# Altium PCB Left Board.PcbDoc
Units mm, origin at the board's own origin, x right, y up, seen from the top; angles counter-clockwise.
Board outline 164.27 x 111 mm, 2 copper layers (Top Layer, Bottom Layer); 22 components, 29 nets, 130 pads, 66 vias.
Unrouted connection lines stored in the file: 1.
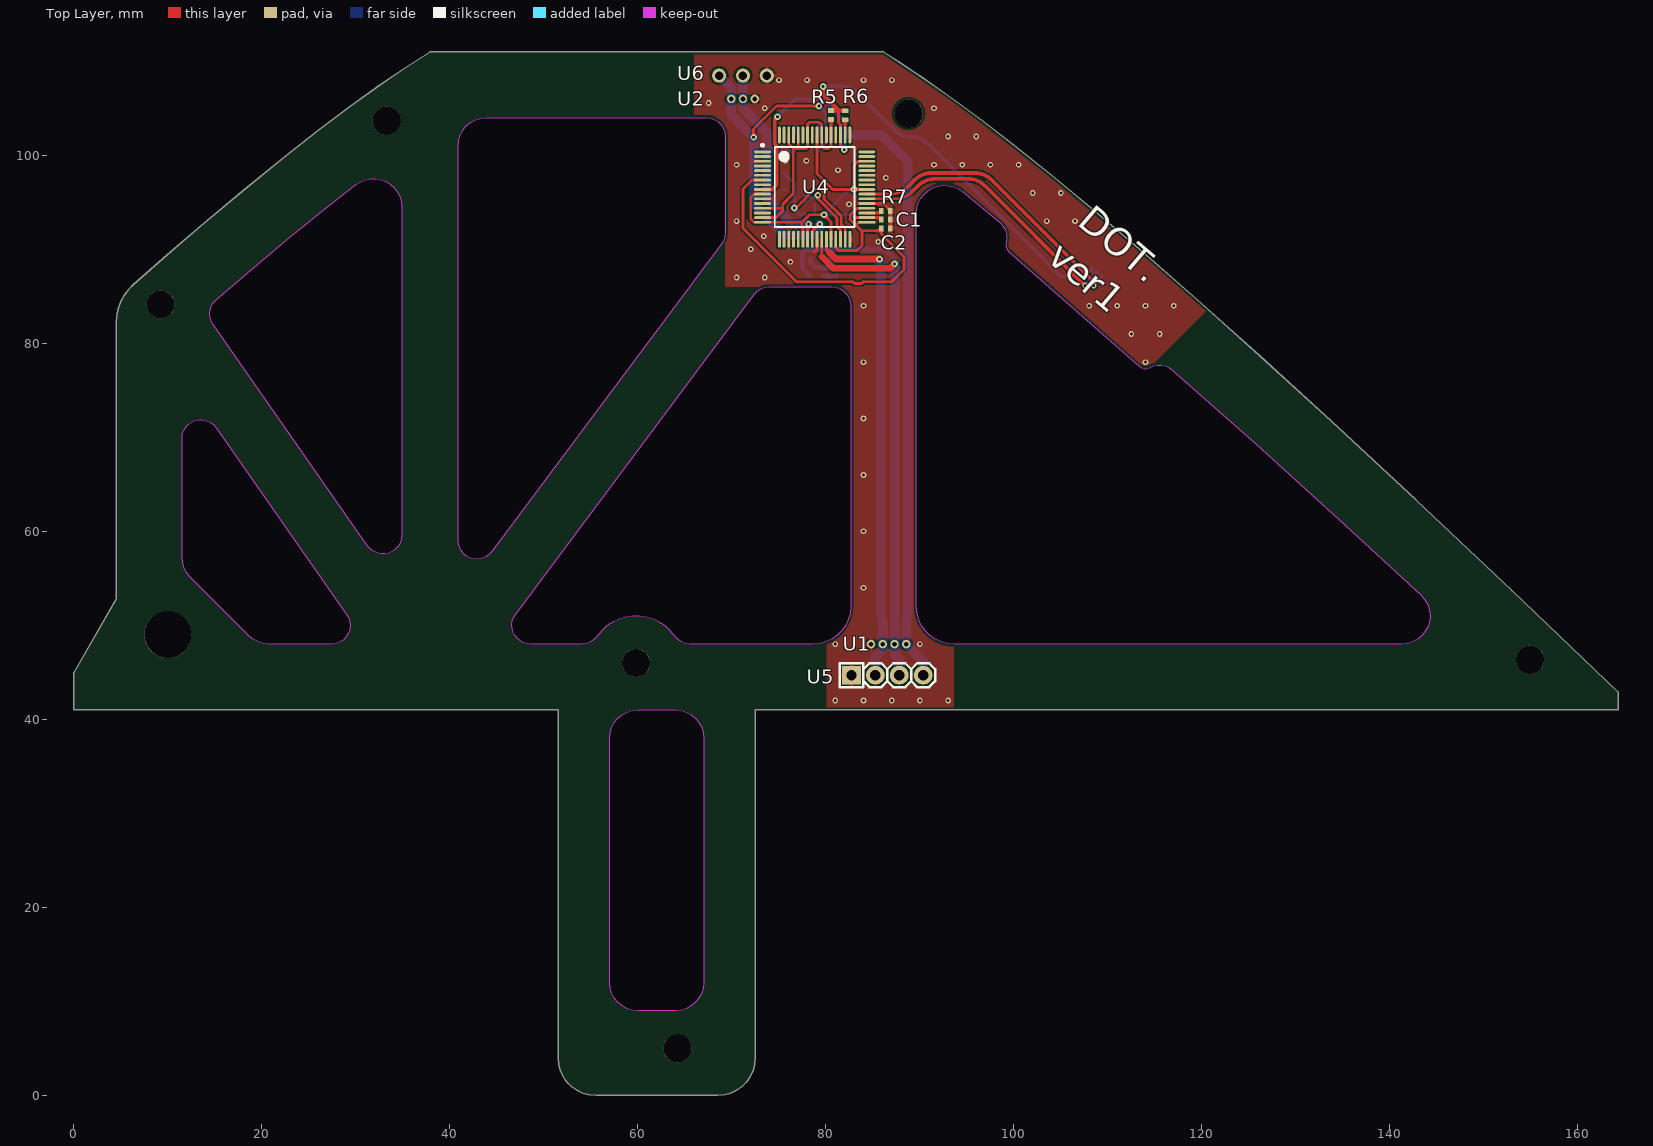
[diagram p0: Top Layer view]
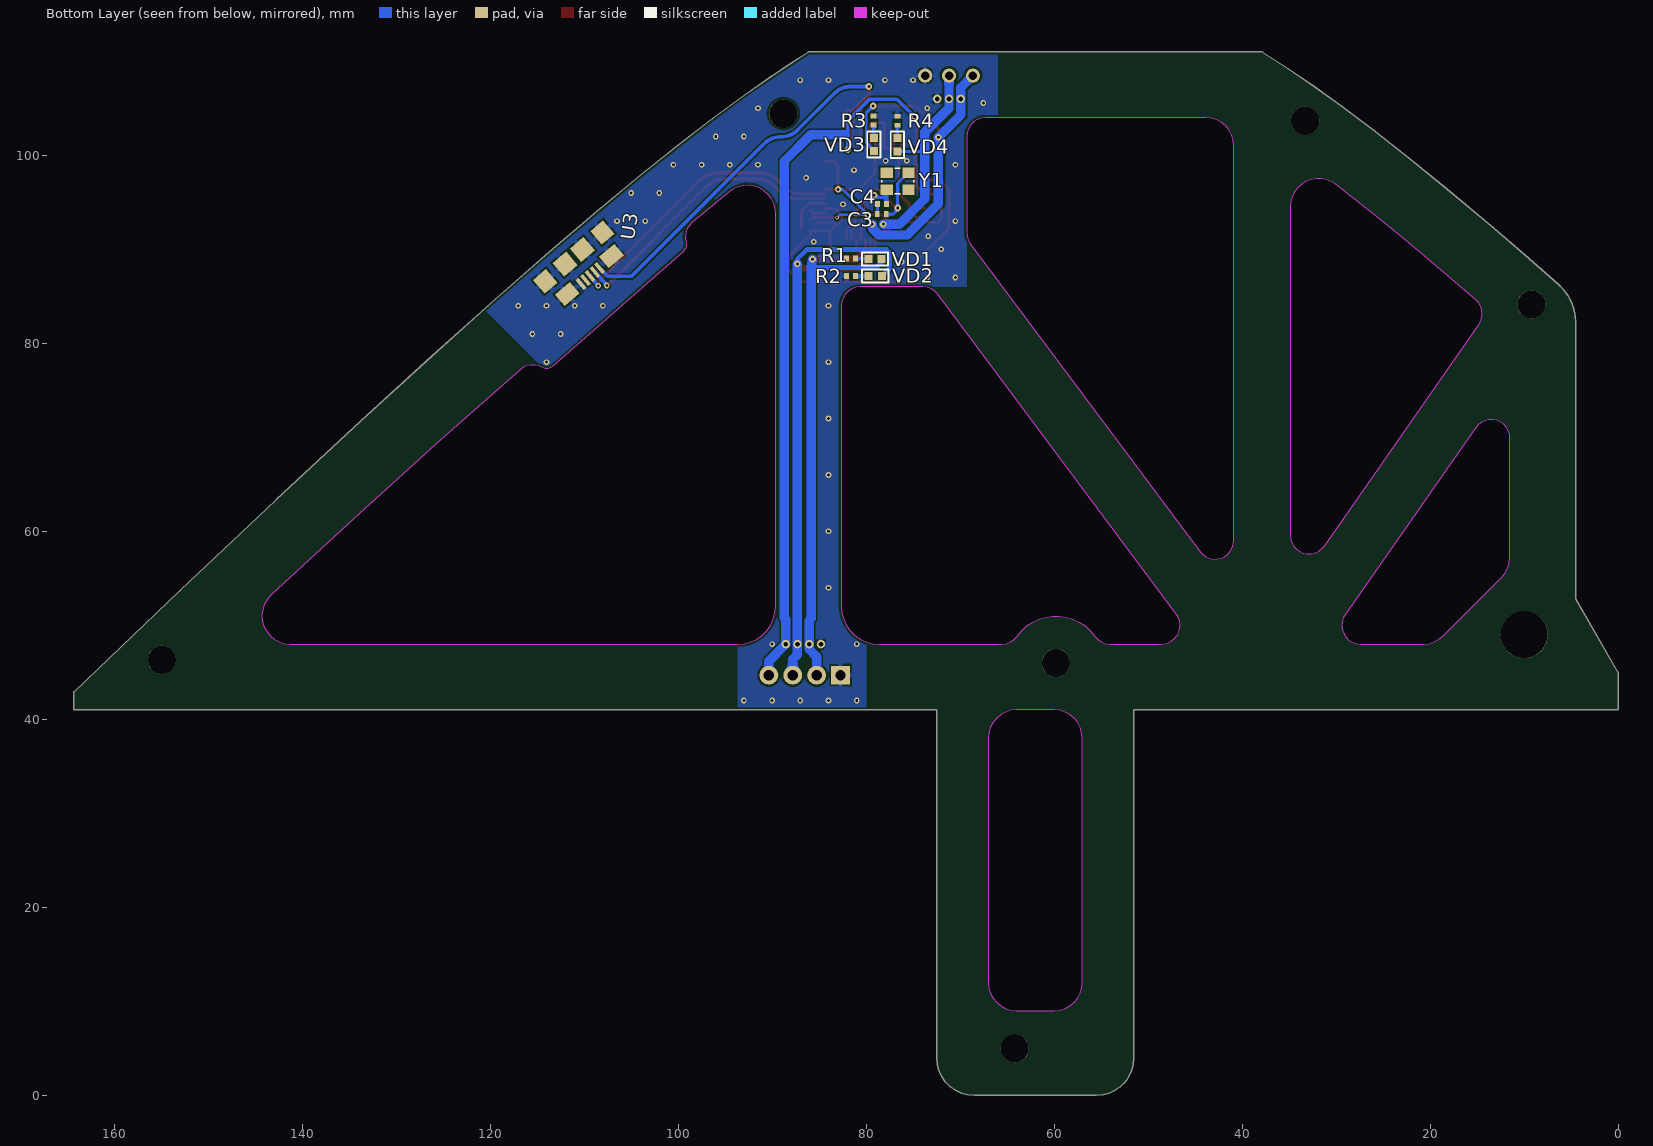
[diagram p1: Bottom Layer view, seen from below]
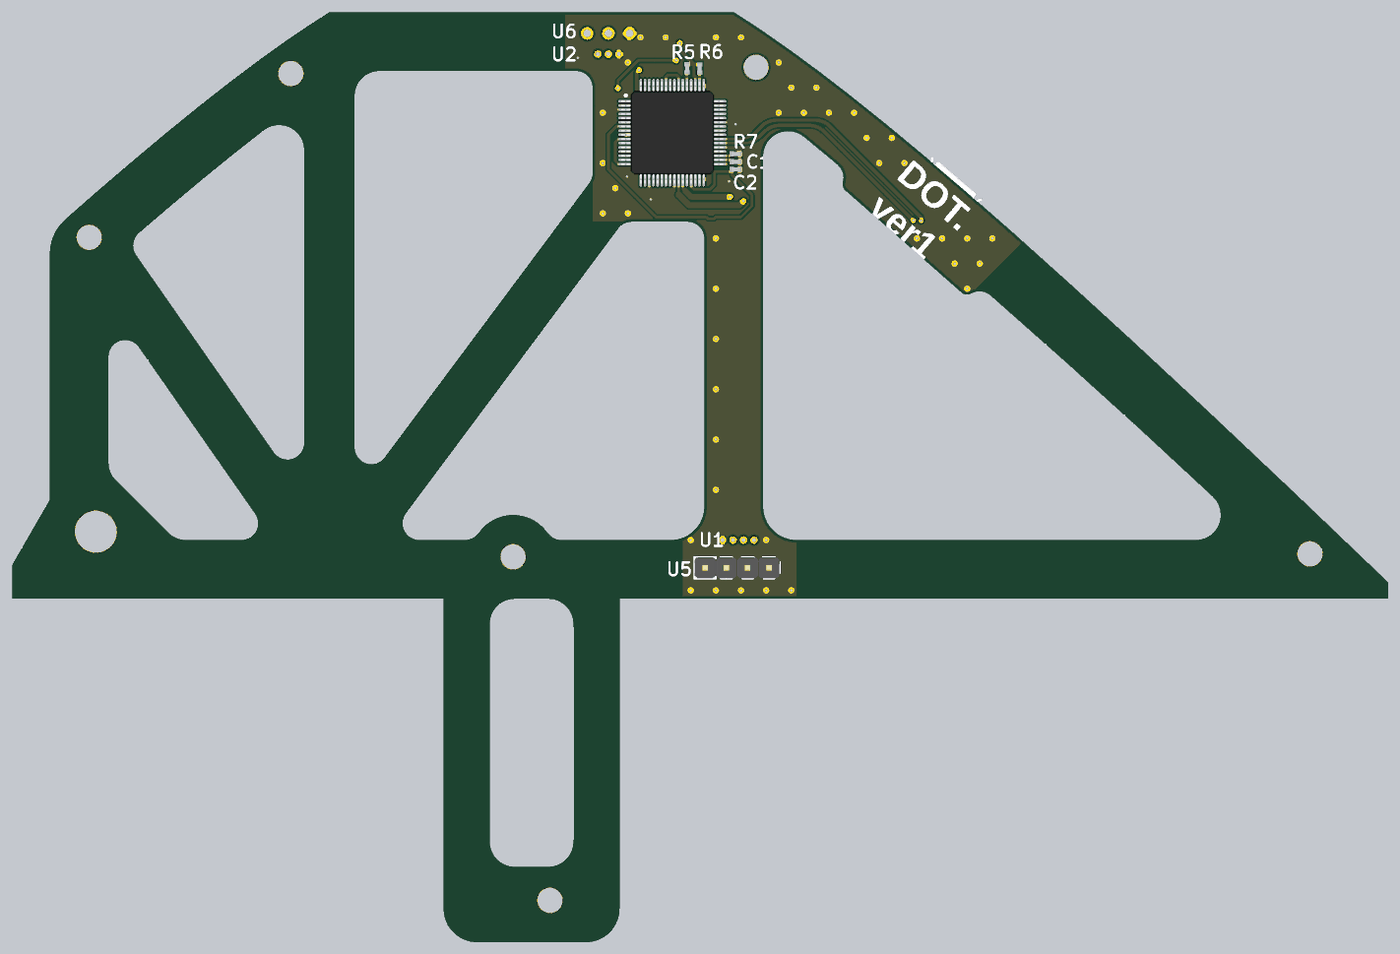
[diagram p2: 3D render of the assembled board from above, using the file's embedded part models]
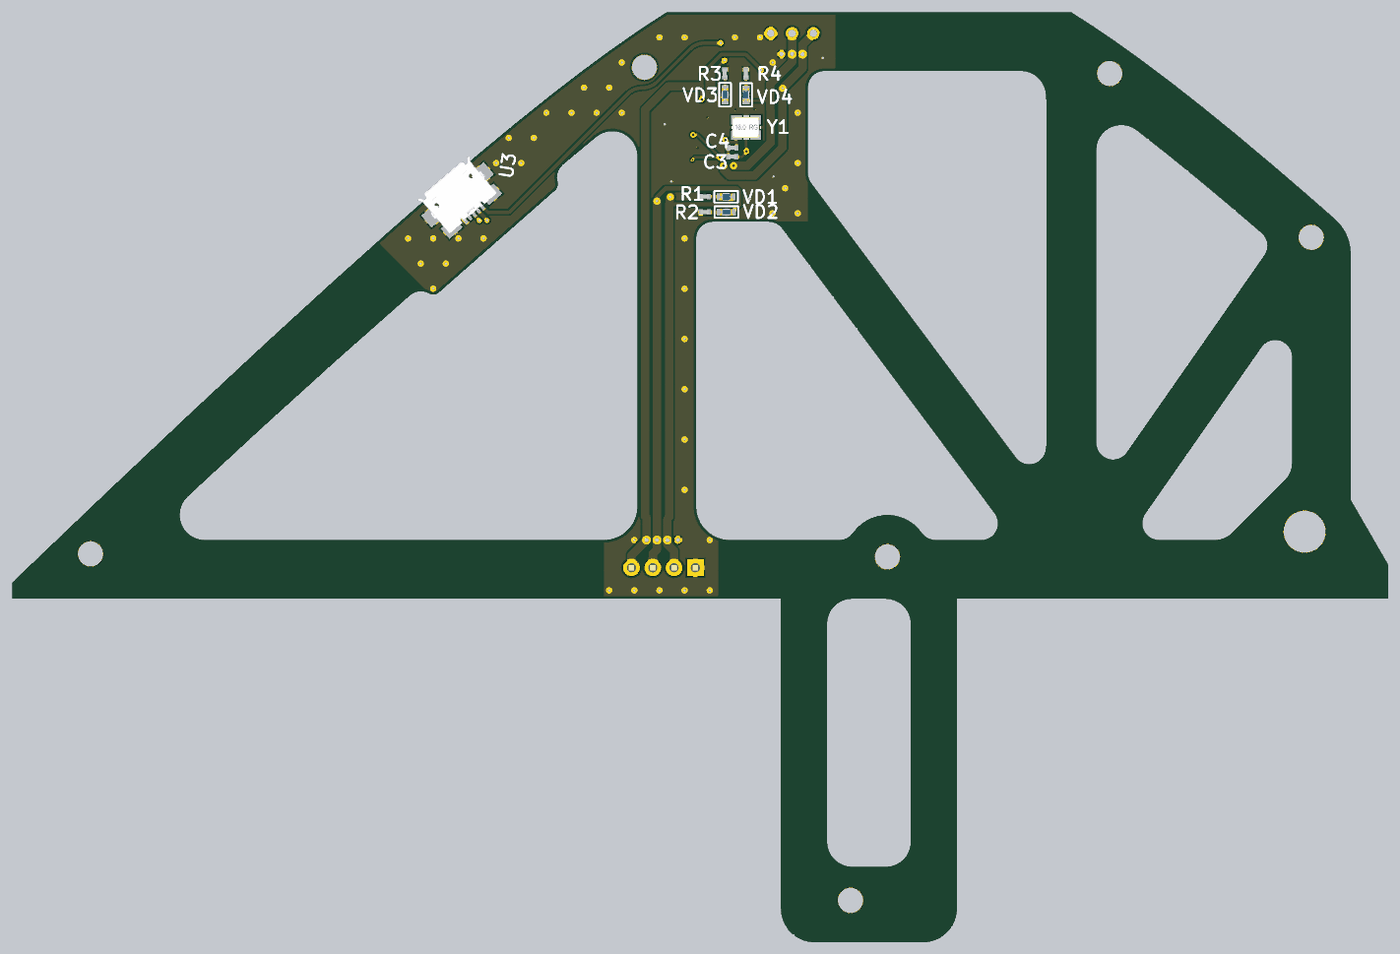
[diagram p3: 3D render of the assembled board from below, using the file's embedded part models]

## Layer stack, top to bottom
Top Solder: solder mask 0.0102, Solder Resist, Dk 3.5
Top Layer: signal copper 0.0356
Dielectric 1: dielectric 0.32, FR-4, Dk 4.8
Bottom Layer: signal copper 0.0356
Bottom Solder: solder mask 0.0102, Solder Resist, Dk 3.5

## Board outline
37.87,111 35.201,109.285 32.584,107.504 29.455,105.261 26.065,102.713 22.279,99.747 18.165,96.402 13.514,92.497 9.926,89.411 6.363,86.293 5.818,85.739 5.356,85.114 4.987,84.43 4.718,83.702 4.555,82.942 4.5,82.167 4.5,52.794 0,45 0,41 51.5,41 51.5,4 51.561,3.305 51.741,2.632 52.036,2 52.436,1.429 52.929,0.936 53.5,0.536 54.132,0.241 54.805,0.061 55.5,0 68.5,0 69.195,0.061 69.868,0.241 70.5,0.536 71.071,0.936 71.564,1.429 71.964,2 72.259,2.632 72.439,3.305 72.5,4 72.5,41 164.27,41 164.27,42.921 152.979,53.703 142.761,63.348 133.772,71.712 126.157,78.675 119.48,84.662 113.675,89.749 108.597,94.081 104.033,97.859 99.979,101.102 96.329,103.909 93.006,106.357 89.978,108.479 88.066,109.758 86.13,111
cut-out: 64,41 64.585,40.942 65.148,40.772 65.667,40.494 66.121,40.121 66.494,39.667 66.772,39.148 66.942,38.585 67,38 67,12 66.942,11.415 66.772,10.852 66.494,10.333 66.121,9.879 65.667,9.506 65.148,9.228 64.585,9.058 64,9 60,9 59.415,9.058 58.852,9.228 58.333,9.506 57.879,9.879 57.506,10.333 57.228,10.852 57.058,11.415 57,12 57,38 57.058,38.585 57.228,39.148 57.506,39.667 57.879,40.121 58.333,40.494 58.852,40.772 59.415,40.942 60,41
cut-out: 34.87,94.538 34.87,59.602 34.826,59.183 34.695,58.783 34.483,58.419 34.199,58.107 33.856,57.862 33.47,57.694 33.057,57.611 32.636,57.616 32.225,57.709 31.843,57.886 31.506,58.139 31.23,58.458 14.805,81.993 14.608,82.347 14.486,82.734 14.445,83.137 14.491,83.563 14.626,83.969 14.845,84.337 15.137,84.65 18.799,87.788 22.663,91.021 26.28,93.962 30.04,96.915 30.51,97.212 31.027,97.417 31.572,97.523 32.128,97.527 32.675,97.428 33.195,97.23 33.669,96.939 34.081,96.566 34.417,96.123 34.666,95.626 34.819,95.091
cut-out: 11.5,57.243 11.5,69.884 11.544,70.303 11.675,70.703 11.888,71.067 12.171,71.378 12.514,71.624 12.9,71.792 13.313,71.875 13.734,71.87 14.145,71.777 14.527,71.6 14.864,71.346 15.14,71.028 29.017,51.145 29.214,50.79 29.336,50.403 29.377,50 29.327,49.555 29.179,49.132 28.941,48.753 28.624,48.436 28.245,48.198 27.822,48.05 27.377,48 20.743,48 20.157,48.058 19.595,48.228 19.076,48.506 18.621,48.879 12.379,55.121 12.006,55.576 11.728,56.095 11.558,56.657
cut-out: 54.055,48 48.599,48 48.199,48.04 47.816,48.16 47.464,48.353 47.158,48.613 46.91,48.928 46.73,49.287 46.625,49.675 46.6,50.075 46.655,50.473 46.789,50.851 46.995,51.196 72.35,85.196 72.668,85.533 73.056,85.788 73.492,85.946 73.953,86 80.63,86 81.075,85.95 81.498,85.802 81.877,85.564 82.194,85.247 82.432,84.868 82.58,84.445 82.63,84 82.63,52 82.569,51.305 82.389,50.632 82.094,50 81.694,49.429 81.201,48.936 80.63,48.536 79.998,48.241 79.324,48.061 78.63,48 65.545,48 65.068,48.058 64.619,48.227 64.223,48.499 63.903,48.857 63.437,49.431 62.891,49.93 62.277,50.343 61.609,50.661 60.902,50.877 60.17,50.986 59.43,50.986 58.698,50.877 57.991,50.661 57.323,50.343 56.709,49.93 56.163,49.431 55.697,48.857 55.377,48.499 54.981,48.227 54.532,48.058
cut-out: 43.87,104 67.3,104 67.745,103.95 68.168,103.802 68.547,103.564 68.864,103.247 69.102,102.868 69.25,102.445 69.3,102 69.3,91.807 69.255,91.383 69.12,90.978 68.903,90.611 44.473,57.85 44.191,57.545 43.852,57.304 43.47,57.138 43.063,57.055 42.647,57.059 42.24,57.148 41.861,57.319 41.526,57.565 41.248,57.876 41.041,58.236 40.913,58.632 40.87,59.046 40.87,101 40.928,101.585 41.098,102.148 41.376,102.667 41.749,103.121 42.203,103.494 42.722,103.772 43.285,103.942
cut-out: 99.474,89.729 113.326,77.557 113.494,77.437 113.683,77.355 113.885,77.313 114.091,77.313 114.292,77.356 114.481,77.439 114.857,77.604 115.26,77.689 115.671,77.69 116.074,77.607 116.451,77.443 116.787,77.206 125.722,69.301 134.566,61.295 143.318,53.189 143.711,52.741 144.007,52.223 144.194,51.657 144.267,51.065 144.22,50.471 144.057,49.897 143.784,49.367 143.412,48.902 142.954,48.519 142.43,48.235 141.861,48.059 141.267,48 93.63,48 92.935,48.061 92.262,48.241 91.63,48.536 91.059,48.936 90.566,49.429 90.166,50 89.871,50.632 89.691,51.305 89.63,52 89.63,93.812 89.683,94.374 89.84,94.916 90.097,95.419 90.443,95.865 90.866,96.239 91.352,96.526 91.883,96.718 92.441,96.806 93.005,96.788 93.556,96.665 94.074,96.441 94.541,96.124 98.524,92.815 98.827,92.5 99.054,92.127 99.195,91.714 99.242,91.28 99.17,90.746 99.135,90.526 99.15,90.303 99.214,90.089 99.323,89.894

## Design rules (kind name [scope] priority, off if disabled: settings)
BoardOutlineClearance [All] p1: gap=0.3 ignorepadtopadclearanceinfootprint=FALSE
Clearance Clearance_MultiLayerPad [OnLayer('Multi-Layer') and IsPad] p1: gap=0.25 ignorepadtopadclearanceinfootprint=FALSE except(0: Arc-Hole Track-Hole SMDPad-Hole THPad-Hole Via-Hole Fill-Hole Poly-Hole Region-Hole Text-Hole)
Clearance Clearance_Polygon [InPolygon] p2: gap=0.2 ignorepadtopadclearanceinfootprint=FALSE except(0: Arc-Hole Track-Hole SMDPad-Hole THPad-Hole Via-Hole Fill-Hole Poly-Hole Region-Hole Text-Hole)
Clearance [All] p3: gap=0.15 ignorepadtopadclearanceinfootprint=FALSE except(0: Arc-Hole Track-Hole SMDPad-Hole THPad-Hole Via-Hole Fill-Hole Poly-Hole Region-Hole Text-Hole)
ComponentClearance [All] p1: gap=0 collisioncheckmode=3 verticalgap=0 showdistances=FALSE
HoleToHoleClearance [All] p1: gap=0.2 allowstackedmicrovias=TRUE
MinimumSolderMaskSliver [All] p1: minsoldermaskwidth=0.2
PlaneClearance [All] p1: clearance=0.5
PlaneConnect [All] p1: planeconnectstyle=Relief reliefexpansion=0.5 reliefentries=4 reliefconductorwidth=0.3 reliefairgap=0.2
PolygonConnect PolygonConnect_PadGND [InNet('GND') and IsPad] p1: connectstyle=Relief reliefconductorwidth=0.5 reliefentries=4 polygonreliefangle="90 Angle" airgapwidth=0.2
PolygonConnect PolygonConnect_Via [IsVia] p2: connectstyle=Direct reliefconductorwidth=0.254 reliefentries=4 polygonreliefangle="90 Angle" airgapwidth=0.254
PolygonConnect [All] p3: connectstyle=Relief reliefconductorwidth=0.3 reliefentries=4 polygonreliefangle="90 Angle" airgapwidth=0.2
RoutingVias [All] p1: holewidth=0.3 width=0.7 viastyle="Through Hole" minholewidth=0.3 minwidth=0.7 maxholewidth=0.3 maxwidth=0.7
SilkToSolderMaskClearance [IsPad] p1: minsilkscreentomaskgap=0.2 clearancetoexposedcopper=TRUE
SolderMaskExpansion [All] p1: expansion=0.075
Width [All] p1: maxlimit=10 minlimit=0.15 preferedwidth=0.15
24 further rules are at their usual default settings.

## Classes and differential pairs
component class "U_USB Hub": C1 C2 C3 C4 C10 C11 C12 C13 R5 R6 R7 R10 R11 R12 U4 U11 Y1 Y2
component class "Main Sheet": R1 R2 R3 R4 U1 U2 U3 U5 U6 U? VD1 VD2 VD3 VD4

## Components (designator, comment, footprint, x,y, rotation, side; value= is the part's Value field where it differs from the comment)
C1 "Value" cap0402 86.375,93.158 r180 top
C2 "Value" cap0402 86.375,92.225 r180 top
C3 "Value" cap0402 78.32,93.775 r180 bottom
C4 "Value" cap0402 78.3,94.829 r180 bottom
R1 "=Value" res0402 81.599,89.007 r0 bottom
R2 "=Value" res0402 81.599,87.152 r180 bottom
R3 "=Value" res0402 79.2,103.709 r90 bottom
R4 "=Value" res0402 76.675,103.684 r270 bottom
R5 "Value" res0402 80.55,104.3 r270 top
R6 "Value" res0402 82.05,104.275 r270 top
R7 "Value" res0402 86.375,94.083 r180 top
U1 "Header 4" 4x1.25 86.675,48 r0 top
U2 "Header 3" 3x1.25 71.175,106 r0 top
U3 "ZX62-B-5PA" ZX62-B-5PA 110.606,88.63 r319.5 bottom
U4 "FE2.1" LQFP64_N_1 78.8,96.622 r0 top
U5 "Header 4" "CON: PLS-4" 86.53,44.7 r0 top
U6 "Header 3" 3x2.54 71.175,108.479 r0 top
VD1 "*" CH0603LB 79.05,88.975 r0 bottom
VD2 "*" CH0603LB 79.02,87.152 r0 bottom
VD3 "*" CH0603LB 79.175,101.15 r90 bottom
VD4 "*" CH0603LB 76.675,101.125 r90 bottom
Y1 "Value" QSMD3.2x2.5_A 76.65,97.25 r0 bottom

## Footprints (in the part's own frame and the unit in brackets; to place one, negate y for a bottom-side part, rotate by r counter-clockwise, add the part's x,y. Pads: shape width x height; smd on the part's side, far side on the other; paste and mask are expansions set on the pad)
3x1.25 [mm]
  round 0.9 hole 0.5: 1(-1.25,0) 2(0,0) 3(1.25,0)
3x2.54 [mm]
  round 1.5 hole 0.9: 1(-2.54,0) 2(0,0) 3(2.54,0)
4x1.25 [mm]
  round 0.9 hole 0.5: 1(-1.875,0) 2(-0.625,0) 3(0.625,0) 4(1.875,0)
cap0402 [mm]
  rect 0.5x0.65 smd: 1(-0.48,0) 2(0.48,0)
  body extent -0.5,-0.25 0.5,0.25, height 0.49
CH0603LB [mm] "Chip Capacitor, 2-Leads, Body 1,53x0,85mm, IPC Medium Density"
  rect 0.85x0.85 smd: 1(-0.7,0) 2(0.7,0)
  silkscreen extent -1.4,-0.7 1.4,0.7, body extent -0.8,-0.4 0.8,0.4, height 0.6
"CON: PLS-4" [mm] "PLS-40 4 pin header"
  rect 2x2 hole 1.1: 1(-3.81,0)
  round 2 hole 1.1: 2(-1.27,0) 3(1.27,0) 4(3.81,0)
  silkscreen extent -5.08,-1.27 5.08,1.27, body extent -5.08,-1.27 5.08,1.27, height 8.54
LQFP64_N_1 [mm] "Thin QFP, 64-Leads, Body 10x10mm, Pitch 0.5mm, IPC Medium Density"
  oval 1.8x0.3 smd: 1(-5.55,3.75) 2(-5.55,3.25) 3(-5.55,2.75) 4(-5.55,2.25) 5(-5.55,1.75) 6(-5.55,1.25) 7(-5.55,0.75) 8(-5.55,0.25) 9(-5.55,-0.25) 10(-5.55,-0.75) 11(-5.55,-1.25) 12(-5.55,-1.75) 13(-5.55,-2.25) 14(-5.55,-2.75) 15(-5.55,-3.25) 16(-5.55,-3.75) 33(5.55,-3.75) 34(5.55,-3.25) 35(5.55,-2.75) 36(5.55,-2.25) 37(5.55,-1.75) 38(5.55,-1.25) 39(5.55,-0.75) 40(5.55,-0.25) 41(5.55,0.25) 42(5.55,0.75) 43(5.55,1.25) 44(5.55,1.75) 45(5.55,2.25) 46(5.55,2.75) 47(5.55,3.25) 48(5.55,3.75)
  oval 0.3x1.8 smd: 17(-3.75,-5.55) 18(-3.25,-5.55) 19(-2.75,-5.55) 20(-2.25,-5.55) 21(-1.75,-5.55) 22(-1.25,-5.55) 23(-0.75,-5.55) 24(-0.25,-5.55) 25(0.25,-5.55) 26(0.75,-5.55) 27(1.25,-5.55) 28(1.75,-5.55) 29(2.25,-5.55) 30(2.75,-5.55) 31(3.25,-5.55) 32(3.75,-5.55) 49(3.75,5.55) 50(3.25,5.55) 51(2.75,5.55) 52(2.25,5.55) 53(1.75,5.55) 54(1.25,5.55) 55(0.75,5.55) 56(0.25,5.55) 57(-0.25,5.55) 58(-0.75,5.55) 59(-1.25,5.55) 60(-1.75,5.55) 61(-2.25,5.55) 62(-2.75,5.55) 63(-3.25,5.55) 64(-3.75,5.55)
  silkscreen extent -5.67,-4.25 4.25,4.57, body extent -6.07,-6.07 6.07,6.07, height 1.57
QSMD3.2x2.5_A [mm]
  rect 1.3x1.1 smd: 1(-1.15,-0.9) 2(1.15,0.9) ""(-1.15,0.9) ""(1.15,-0.9)
  silkscreen extent -1.7,-1.35 1.7,1.35, body extent -1.58,-1.25 1.63,1.25, height 0.81
res0402 [mm]
  rect 0.5x0.65 smd: 1(-0.48,0) 2(0.48,0)
  body extent -0.5,-0.25 0.5,0.25, height 0.34
ZX62-B-5PA [mm]
  rect 0.4x1.35 smd: 1(-1.3,1.927) 2(-0.65,1.927) 3(0,1.927) 4(0.65,1.927) 5(1.3,1.927)
  rect 1.8x1.9 smd: 5(-4,-0.75) 5(4,-0.75)
  rect 2.1x1.6 smd: 5(-3.1,1.8) 5(3.1,1.8)
  rect 1.9x1.9 smd: 6(-1.2,-0.75) 6(1.2,-0.75)
  body extent -4.04,-3.46 4.04,2.14, height 2.78

## Part data
C1 C2 C3 C4: library part "Cap SMD"
R1 R2 R3 R4 R5 R6 R7: library part "Resistor SMD"
VD1 VD2 VD3 VD4: library part LED
Y1: library part Quartz

## Free pads (board coordinates)
  round 3 hole 3: 1(9.211,84.134) 1(33.27,103.682) 1(59.8,46) 1(64.2,5) 1(88.8,104.433) 1(154.906,46.346)
  round 5 hole 5: 1(10,49)

## Via types
v1: diameter 0.6, hole 0.3, Top Layer to Bottom Layer, 52 vias
v2: diameter 0.7, hole 0.3, Top Layer to Bottom Layer, 13 vias
v3: diameter 0.4, hole 0.2, Top Layer to Bottom Layer, 1 vias

## Nets (pads, with @x,y where several pads share a name; then routed paths per layer and width w, separated by ;. In a path a pad name is that pad's centre, name@x,y a point inside that pad or via, vN(x,y) a via of type N, cw(c..) or ccw(c..) an arc to the next point about the centre after c; other vN are vias at no path point)
Cam_d+: U2.1 U4.24 U6.1 VD3.1 | length 40.7
  Top Layer w0.3: v2(72.3,101.925) 72.3,102.8 74.75,105.25 v2(79.25,105.25) ; U4.24 78.55,91.958 79.267,92.675 v2(79.35,92.675)
  Bottom Layer w0.3: VD3.1 79.25,100.525 79.124,100.525 79.975,101.376 79.975,104.525 v2(79.25,105.25)
  Bottom Layer w1: U6.1 69.925,107.189 U2.1 69.925,104.3 v2(72.3,101.925) 72.3,94.85 75.625,91.525 78.501,91.525 78.506,91.53 78.63,91.53 79.304,92.203 79.304,92.327 79.35,92.374 v2(79.35,92.675)
Cam_d-: U2.2 U4.23 U6.2 VD4.1 | length 26.3
  Top Layer w0.3: U4.23 78.05,92.65 78.08,92.68 v2(78.154,92.68)
  Bottom Layer w0.3: 73.775,102.4 73.775,100.425 VD4.1
  Bottom Layer w1: U6.2 U2.2 71.175,105.026 73.775,102.426 73.775,100.425 73.775,99.331 73.75,99.306 73.75,95.381 76.456,92.675 76.46,92.68 v2(78.154,92.68)
DM1: U1.3 U4.26 U5.3 VD2.1 | length 68
  Top Layer w0.3: 79.55,89.225 U4.26
  Top Layer w0.7: 79.55,89.225 80.8,87.975 86.825,87.975 v2(87.304,88.454)
  Bottom Layer w0.5: VD2.1 77.495,87.977 77.495,89.645 77.825,89.975 86.302,89.975 87.304,88.973 v2(87.304,88.454)
  Bottom Layer w1: U1.3 87.3,46.9 87.8,46.4 U5.3 ; U1.3@87.304,48 v2(87.304,88.454)
DM3: U4.20
DM4: U4.17
DM5: U4.41
DM6: U4.44
DM7: U4.47
DMU: U3.2 U4.38 | length 30.4
  Top Layer w0.3: U4.38 87.37,95.372 ccw(c87.37,97.912) 89.166,96.116
  Top Layer w0.4: 89.166,96.116 89.806,96.756 cw(c91.602,94.96) 91.602,97.5 95.128,97.5 cw(c95.128,94.96) 96.924,96.756 v1@107.512,86.167
  Bottom Layer w0.4: v1@107.642,86.225 v1(107.575,86.15) U3.2
DP1: U1.2 U4.27 U5.2 VD1.1 | length 60.4
  Top Layer w0.3: U4.27 80.05,89.982 80.382,89.65
  Top Layer w0.7: 80.382,89.65 81.057,88.975 85.679,88.975 v2(85.7,88.954)
  Bottom Layer w0.5: VD1.1 78.35,88.6 78.875,88.075 85.84,88.075
  Bottom Layer w0.7: 85.84,50.825 85.7,50.693 85.918,50.475
  Bottom Layer w1: U5.2 85.26,46.66 86.05,47.45 U1.2 86.05,50.475 85.84,50.825 85.84,88.075 v2(85.7,88.954)
DP3: U4.21
DP4: U4.18
DP5: U4.42
DP6: U4.45
DP7: U4.48
DPU: U3.3 U4.39 | length 31.3
  Top Layer w0.3: U4.39 86.87,95.872 ccw(c86.87,98.412) 88.666,96.616
  Top Layer w0.4: 88.666,96.616 89.431,97.381 cw(c91.227,95.585) 91.227,98.125 95.848,98.125 cw(c95.848,95.585) 97.644,97.381 108.5,86.525 v1(108.5,86.127)
  Bottom Layer w0.4: v1(108.5,86.127) U3.3
GND: C1.1 C2.1 C3.1 C4.1 R1.2 R2.1 R3.2 R4.1 R7.1 U1.1 U2.3 U3.5 U3.6 U4.3 U4.11 U4.19 U4.25 U4.32 U4.37 U4.43 U4.49 U5.1 U6.3 | length 7.2
  Top Layer w0.3: 78.775,89.729 79.05,90.004 U4.25 ; U4.37 86.106,94.872 86.855,94.123 R7.1 C1.1 C2.1
  Bottom Layer w0.3: C4.1 78.8,94.809 C3.1
  other v1: 81,42 84,42 87,42 90,42 93,42 81,48 90,48 84,54 84,60 84,66 84,72 84,78 114,78 112.5,81 115.5,81 84,84 108,84 111,84 114,84 117,84 70.5,87 73.5,87 76.22,88.663 72,90 85.575,90.8 73.387,91.383 70.5,93 103.5,93 106.5,93 82.453,94.797 102,96 105,96 86.375,97.622 81.286,98.425 70.5,99 91.5,99 94.5,99 97.5,99 100.5,99 75.675,99.425 77.925,99.425 93,102 96,102 73.5,105 91.5,105 67.523,105.56 75,108 78,108 84,108 87,108
NetR1_1: R1.1 VD1.2 | length 1.4
  Bottom Layer w0.4: VD1.2@79.72,89.007 R1.1
NetR2_2: R2.2 VD2.2 | length 1.4
  Bottom Layer w0.5: VD2.2 R2.2
NetR3_1: R3.1 VD3.2 | length 1.4
  Bottom Layer w0.3: VD3.2 R3.1@79.175,103.204
NetR4_2: R4.2 VD4.2 | length 1.4
  Bottom Layer w0.3: VD4.2 R4.2
NetR6_2: R6.2 U4.50 | length 1.6
  Top Layer w0.3: U4.50 R6.2
NetR7_2: R7.2 U4.35 | length 1.6
  Top Layer w0.3: U4.35 85.684,93.872 R7.2
OVCJ: R5.2 U4.13 U4.15 U4.53 U4.55 U4.58 U4.60 U4.62 | length 25.9
  Top Layer w0.3: U4.15@73.75,93.372 74.707,93.372 75.4,94.065 75.4,94.372 ; U4.13@73.75,94.372 74.7,94.372 75.4,94.372 ; U4.62 76.05,101.2 76.525,100.725 ; U4.60 77.05,100.7 ; R5.2 U4.53 80.55,101 80.25,100.7 79.85,100.7 79.55,101 U4.55 79.55,103.25 79.275,103.525 78.275,103.525 78.05,103.3 U4.58 78.05,100.875 77.875,100.7 77.05,100.7 ; 75.4,94.372 75.4,94.797 76.525,95.922 76.525,100.725 ; 76.525,100.725 76.55,100.7 77.05,100.7
VBUS: R5.1 R6.1 U1.4 U3.1 U4.9 U4.51 U5.4 | length 130.4
  Top Layer w0.3: 81.35,104.78 81.35,103.496 81.55,103.296 U4.51 81.55,100.998 v2(81.95,100.598)
  Top Layer w0.4: U4.9 74.3,96.372 74.75,96.822 74.75,101.015 74.55,101.215 74.55,103.8 v2(74.85,104.1) ; v2(79.7,107.325) 79.7,106.48 81.4,104.78 82.025,104.78 R6.1 ; R5.1 81.35,104.78
  Bottom Layer w0.4: v2(74.85,104.1) 76.725,105.975 79.644,105.975 81.95,103.669 v2(81.95,100.598) ; v2(79.7,107.325) 81.598,107.325 cw(c81.598,104.785) 83.394,106.581 87.259,102.716 ccw(c89.048,104.505) 89.048,101.975 cw(c89.048,99.435) 90.844,101.231 104.948,87.127 107.484,87.127 U3.1
  Bottom Layer w1: 82.2,102.175 85.898,102.175 88.7,99.373 88.7,50.8 88.55,50.65 U1.4 90.34,46.21 U5.4
VD18: C2.2 U4.7 U4.29 U4.33 U4.36 | length 46.1
  Top Layer w0.3: U4.7 72.122,97.372 71.175,96.425 71.175,92.25 76.875,86.55 82.85,86.55 83.05,86.35 83.769,86.35 83.969,86.55 87,86.55 88.3,87.85 88.3,89.195 85.895,91.6 85.895,91.977 83.823,91.977 ; U4.29 81.05,90.186 81.364,89.872 81.736,89.872 81.739,89.875 81.861,89.875 81.864,89.872 82.236,89.872 82.239,89.875 82.361,89.875 82.364,89.872 83.283,89.872 83.823,90.411 83.823,91.977 ; 83.2,92.6 83.472,92.872 U4.33 U4.33@85.225,92.872 ; U4.36 83.315,94.372 82.578,93.635 82.578,93.221 82.55,93.193 83.766,91.977 83.823,91.977
VD33: C1.2 U4.10 U4.16 U4.22 U4.28 U4.34 U4.40 U4.46 U4.56 | length 41.6
  Top Layer w0.3: U4.10 72.364,95.872 72,95.508 72,93.236 72.364,92.872 U4.16 77.427,92.872 ; U4.22 77.55,92.163 77.427,92.286 77.427,92.872 ; U4.56 79.05,98.05 80.728,96.372 v2(82.975,96.372) ; U4.28 80.55,92.925 v2(79.795,93.68) 78.235,93.68 77.427,92.872 ; v3(83.078,93.372) U4.34 85.681,93.372 C1.2 ; U4.40 v2(82.975,96.372) ; U4.46 83.397,99.372 82.975,98.95 v2(82.975,96.372)
  Bottom Layer w0.3: v2(82.975,96.372) 82.475,96.372 82.475,96.359 v2(79.795,93.68) 82.77,93.68 v3(83.078,93.372)
XIN: C4.2 U4.30 Y1.2 | length 8.4
  Top Layer w0.3: v2(79.15,95.75) 79.15,95.375 81.176,93.349 81.176,92.398 81.55,92.024 U4.30
  Bottom Layer w0.3: C4.2@77.795,95.071 77.8,95.076 77.8,95.525 ; Y1.2 77.8,95.525 ; v2(79.15,95.75) 78.925,95.525 77.8,95.525
XOUT: C3.2 U4.31 Y1.1 | length 15.9
  Top Layer w0.3: v2(76.625,94.4) 76.799,94.4 78.799,96.4 79.419,96.4 79.8,96.019 79.8,95.361 81.626,93.535 81.626,92.636 82.05,92.212 U4.31
  Bottom Layer w0.3: Y1.1 76.65,97 76.65,94.425 v2(76.625,94.4) 76.625,94.25 77.15,93.725 77.79,93.725 C3.2
pads on no net: U3.4 U4.1 U4.2 U4.4 U4.5 U4.6 U4.8 U4.12 U4.14 U4.52 U4.54 U4.57 U4.59 U4.61 U4.63 U4.64 Y1.
copper on no net: | length 0.2
  Bottom Layer w0.3: 75.5,96.35 75.676,96.35

## Polygon pours and split planes (outlines as drawn)
GND on Bottom Layer "bottom gmd" (solid, pour order 2): 66,101.8 69.3,98.5 69.3,86 79.943,86 81.55,84.393 81.55,50.502 79.873,50.502 78.8,49.429 79.293,48.936 79.998,48.936 79.998,40.121 80.119,40 93.63,40 93.63,48.936 112,67.306 112,75 123,86 123,115 67,115 66,114
no net on Bottom Layer "top layer gng" (solid, remove dead copper, pour order 0): 67.3,112.5
GND on Top Layer "top gnd" (solid, pour order 4): 66,112 66,102.857 69.3,99.557 69.3,86 79.275,86 79.275,51.434 80.077,50.632 80.077,38 91.63,38 93.63,40 93.603,40.027 93.603,56.603 129.838,92.838 103.675,119 98,119

## Silkscreen, mask and mechanical layers (free items; w line width, h text height)
Top Overlay:
  text "DOT. / ver1" at 102.75,88.149 h5 r319.5
Mechanical 5:
  drawing of 316 lines, arcs and shapes, not listed